# Altium PCB PCB1.PcbDoc (part 1 of 2)
Units mm, origin at the board's own origin, x right, y up, seen from the top; angles counter-clockwise.
Board outline 100 x 50 mm, 2 copper layers (Top Layer, Bottom Layer); 173 components, 108 nets, 510 pads, 764 vias.
Unrouted connection lines stored in the file: 12.
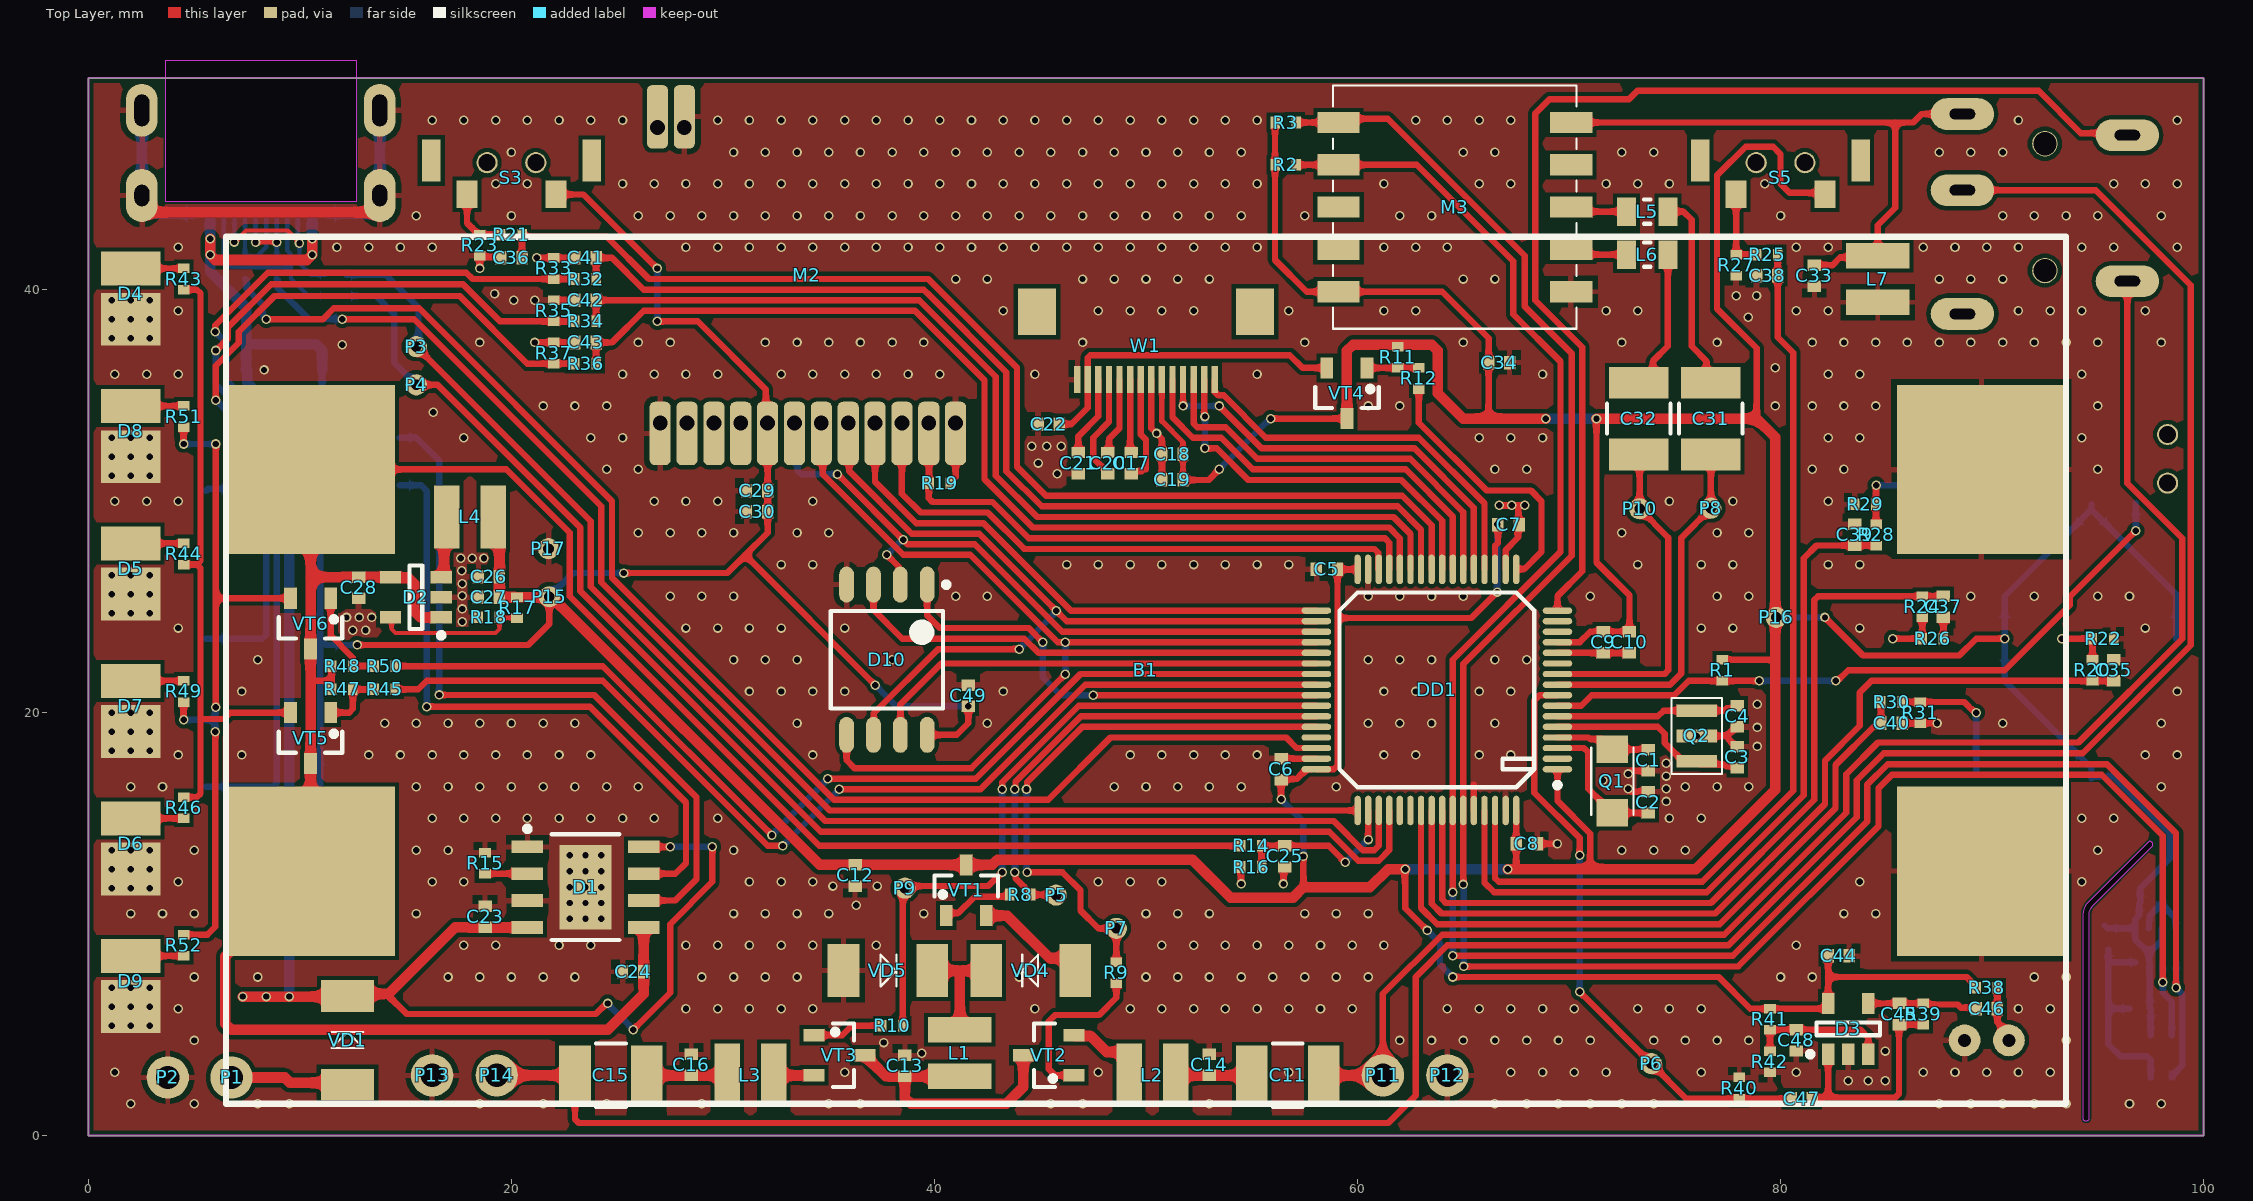
[diagram p0: Top Layer view]
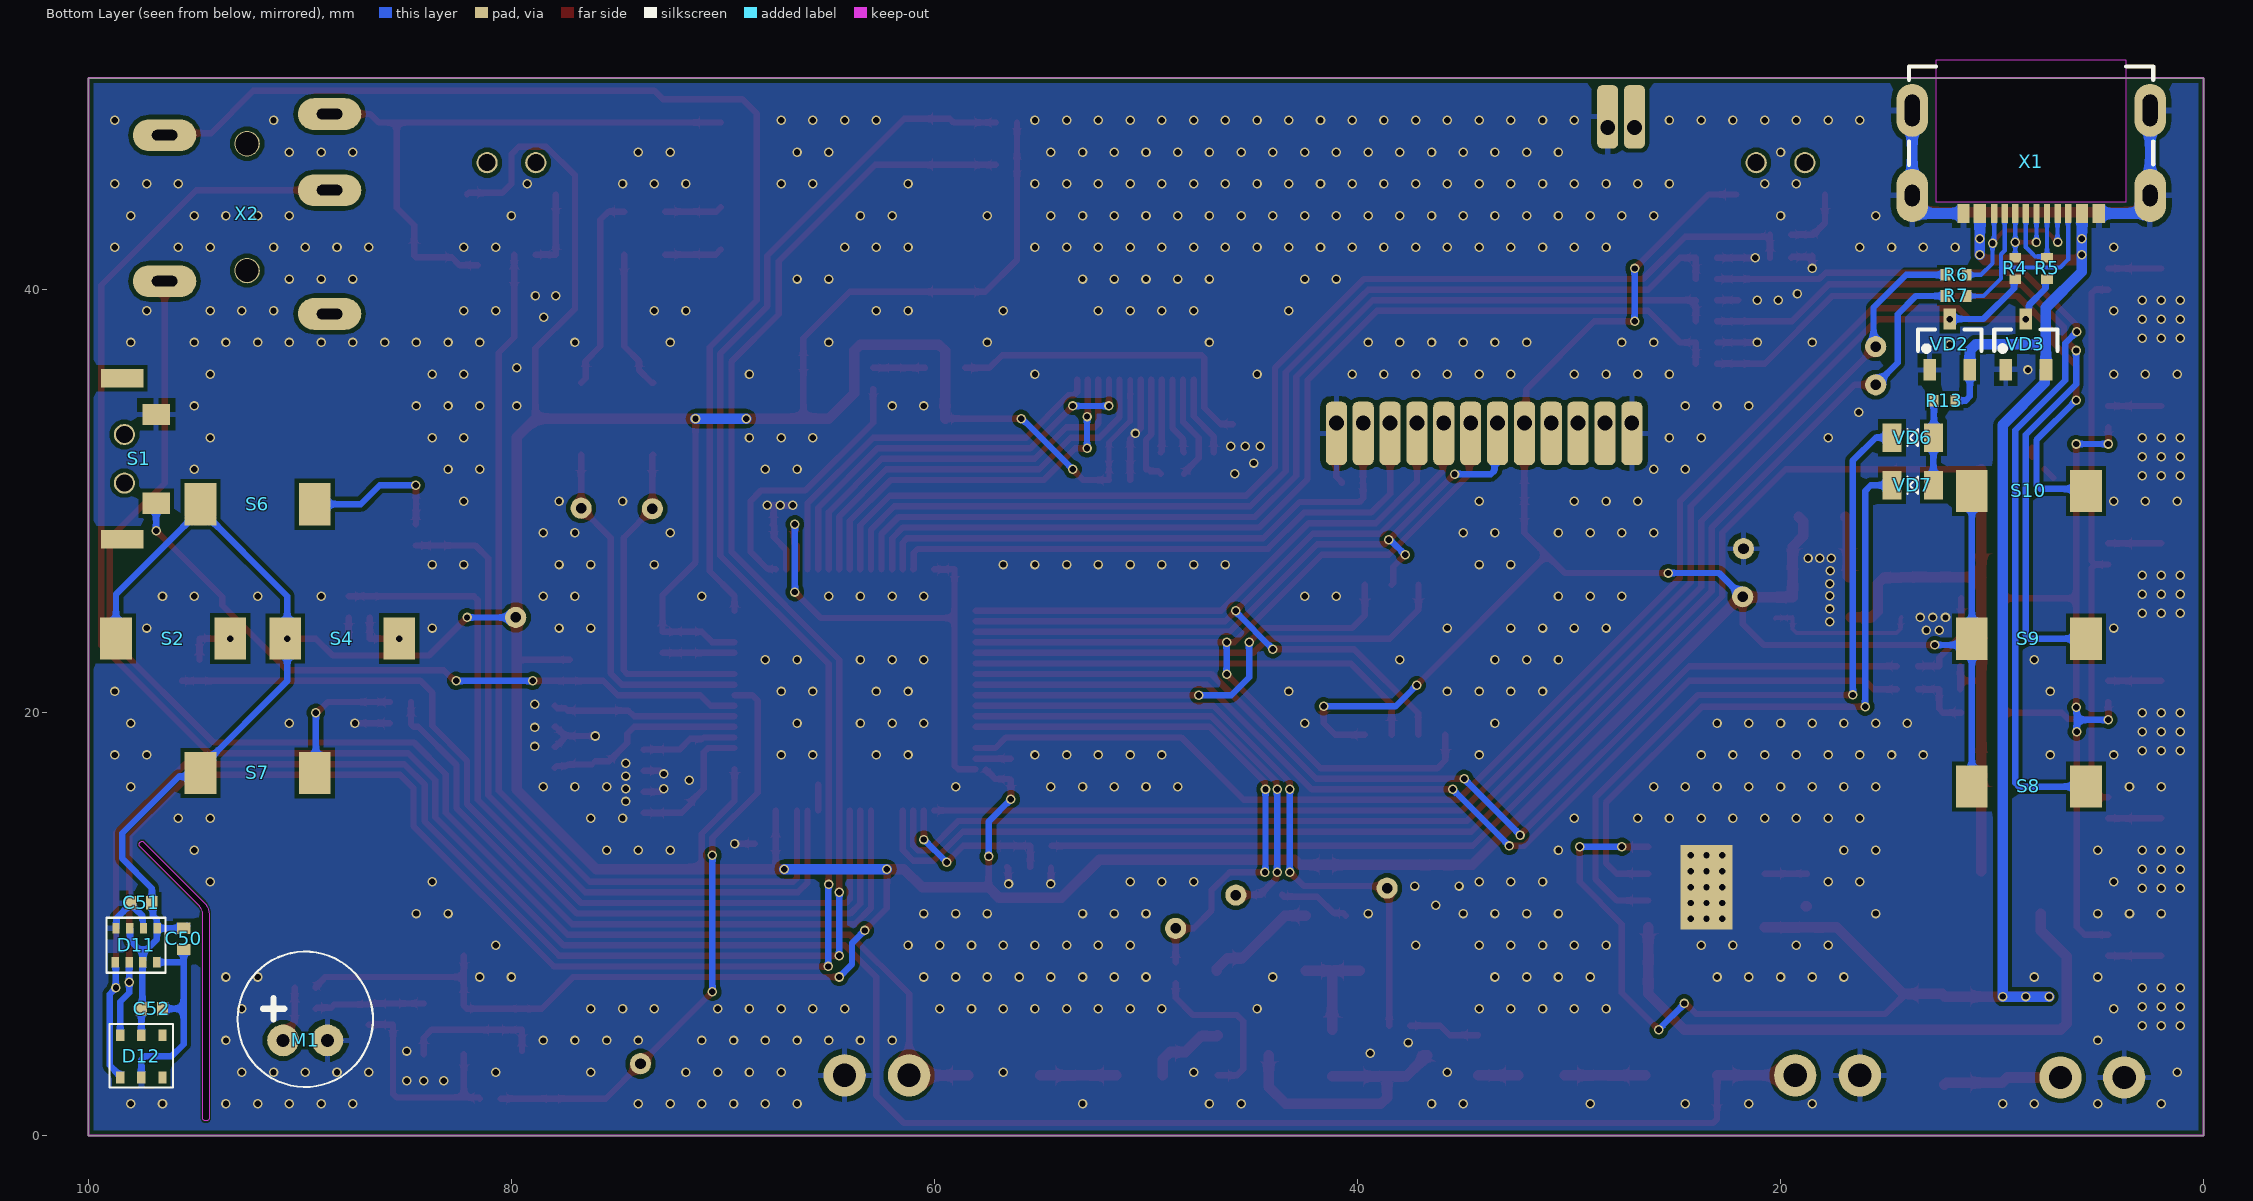
[diagram p1: Bottom Layer view, seen from below]
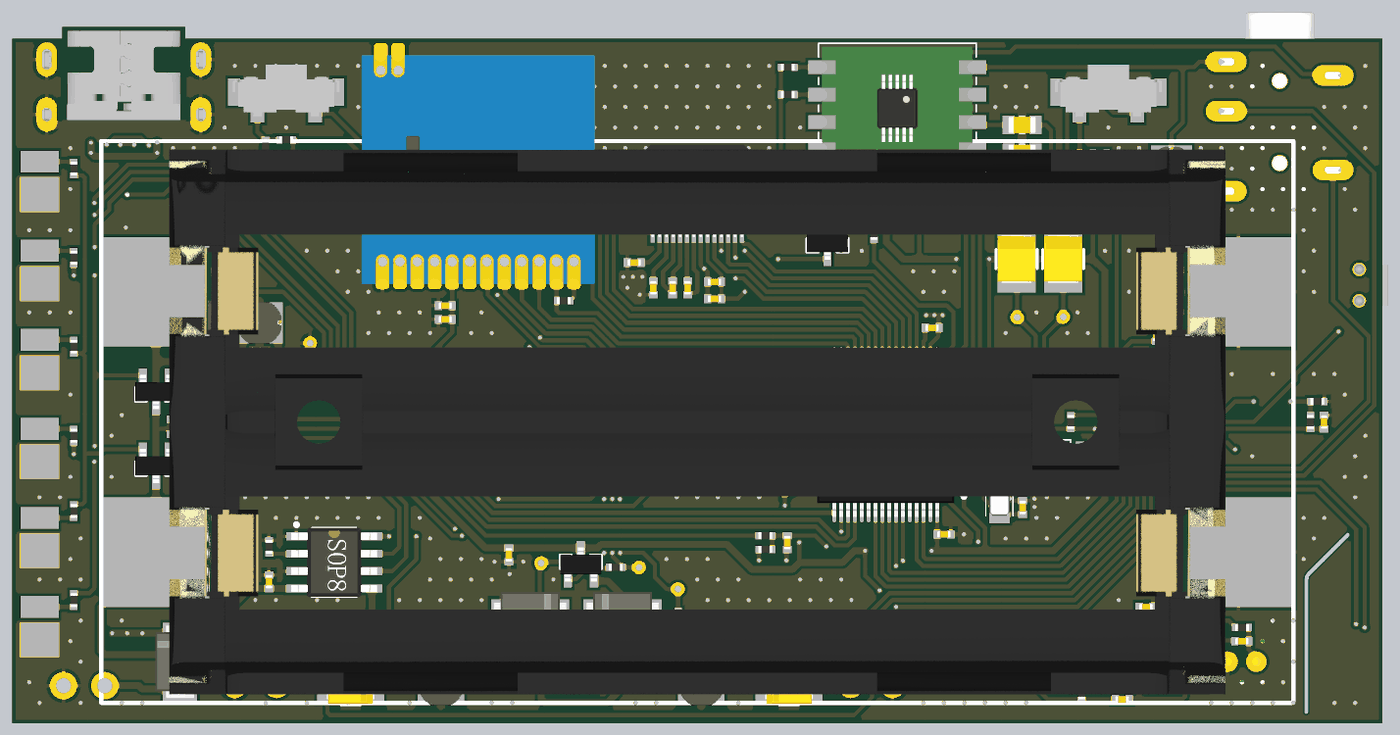
[diagram p3: 3D render of the assembled board from above, using the file's embedded part models]
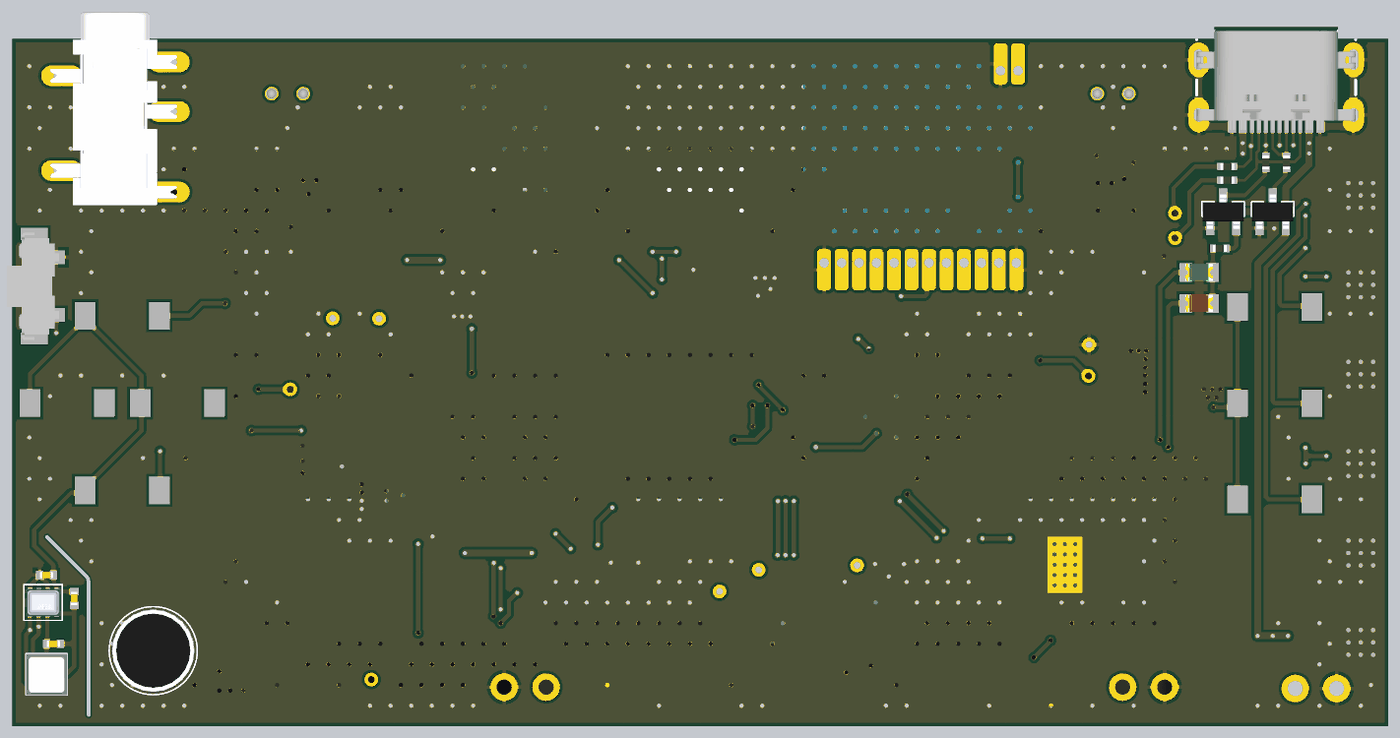
[diagram p4: 3D render of the assembled board from below, using the file's embedded part models]

## Layer stack, top to bottom
Top Solder: solder mask 0.0102, Solder Resist, Dk 3.5
Top Layer: signal copper 0.0356
Dielectric 1: dielectric 0.32, FR-4, Dk 4.8
Bottom Layer: signal copper 0.0356
Bottom Solder: solder mask 0.0102, Solder Resist, Dk 3.5

## Board outline
0,0 0,50 100,50 100,0
cut-out: 94.6,0.8 94.6,10.459 cw(c95.183,10.459) 94.771,10.871 97.6,13.7 ccw(c97.455,13.755) 97.4,13.9 94.541,11.041 ccw(c95.124,10.459) 94.3,10.459 94.3,0.8 ccw(c94.45,0.85)

## Design rules (kind name [scope] priority, off if disabled: settings)
Clearance [All] p1: gap=0.1 ignorepadtopadclearanceinfootprint=FALSE except(0.2: Arc-Arc Arc-Poly Track-Poly SMDPad-Poly THPad-Poly Via-Poly Fill-Poly Poly-Poly)
HoleSize [All] p1: absolutevalues=TRUE maxlimit=6.3 minlimit=0.15 maxpercent=80.000 minpercent=20.000
HoleToHoleClearance [All] p1: gap=0.2 allowstackedmicrovias=TRUE
MinimumSolderMaskSliver [All] p1: minsoldermaskwidth=0.1
PolygonConnect [All] p1: connectstyle=Relief reliefconductorwidth=0.254 reliefentries=4 polygonreliefangle="90 Angle" airgapwidth=0.254
RoutingVias [All] p1: holewidth=0.15 width=0.25 viastyle="Through Hole" minholewidth=0.2 minwidth=0.35 maxholewidth=0.3 maxwidth=0.6
SilkToSilkClearance [All] p1 off: silktosilkclearance=0.15
SilkToSolderMaskClearance [IsPad] p1: minsilkscreentomaskgap=0.15 clearancetoexposedcopper=TRUE
SolderMaskExpansion [All] p1: expansion=0.038 istentingtop=FALSE
Width [All] p1: maxlimit=0.5 minlimit=0.1 preferedwidth=0.3
25 further rules are at their usual default settings.

## Classes and differential pairs
component class IN: C44 C45 C46 C47 C48 D3 R38 R39 R40 R41 R42
polygon class Bottom: JOPA_L01_P003
component class Main: C1 C2 C3 C4 C5 C6 C7 C8 C9 C10 DD1 M1 P1 P2 P3 P4 P5 P6 P7 P8 P9 P10 P11 P12 P13 P14 P15 P16 P17 Q1 Q2 R1 R2 R3 R4 R5 R6 R7 S1 VD1 VD2 VD3 X1 X2
component class Designator: B1 C23 C24 C25 C26 C27 C28 D1 D2 L4 R13 R14 R15 R16 R17 R18 VD6 VD7

## Components (designator, comment, footprint, x,y, rotation, side; value= is the part's Value field where it differs from the comment)
B1 "18650_X2_holder" 18650_X2 50,22 r90 top locked
C1 "12pF" Cap_0402 73.75,17.75 r270 top
C2 "12pF" Cap_0402 73.742,15.758 r90 top
C3 "33pF" Cap_0402 77.953,17.886 r90 top
C4 "33pF" Cap_0402 77.953,19.824 r270 top
C5 "100nF" Cap_0402 58.554,26.774 r180 top
C6 "100nF" Cap_0402 56.388,17.324 r90 top
C7 "100nF" Cap_0402 67.14,28.888 r0 top
C8 "100nF" Cap_0402 68.004,13.8 r0 top
C9 "100nF" Cap_0402 71.628,23.324 r270 top
C10 "1uF" Cap_0402 72.858,23.324 r270 top
C11 "6.3v 220uF" "Tantalum TYPE-B" 56.7,2.85 r90 top
C12 "100nF" Cap_0402 36.25,12.3 r90 top
C13 "10uF" Cap_0402 38.6,3.3 r90 top
C14 "1uF" Cap_0402 53,3.35 r90 top
C15 "6.3v 220uF" "Tantalum TYPE-B" 24.7,2.85 r270 top
C16 "1uF" Cap_0402 28.5,3.35 r90 top
C17 "1uF" Cap_0402 49.3,31.8 r270 top
C18 "100nF" Cap_0402 51.25,32.226 r180 top
C19 "1uF" Cap_0402 51.25,31 r180 top
C20 "1uF" Cap_0402 48.2,31.8 r90 top
C21 "22nF" Cap_0402 46.8,31.8 r90 top
C22 "1uF" Cap_0402 45.4,33.641 r180 top
C23 "10uF" Cap_0402 18.75,10.345 r90 top
C24 "10uF" Cap_0402 25.75,7.75 r180 top
C25 "1uF" Cap_0402 56.569,13.2 r90 top
C26 "10uF" Cap_0402 18.93,26.431 r180 top
C27 "100nF" Cap_0402 18.93,25.456 r180 top
C28 "10uF" Cap_0402 12.77,25.906 r270 top
C29 "100nF" Cap_0402 31.61,30.5 r180 top
C30 "10uF" Cap_0402 31.61,29.5 r180 top
C31 "6.3v 220uF" "Tantalum TYPE-B" 76.7,33.9 r0 top
C32 "6.3v 220uF" "Tantalum TYPE-B" 73.3,33.9 r0 top
C33 "22pF" Cap_0402 81.6,40.656 r270 top
C34 "100nF" Cap_0402 66.7,36.55 r0 top
C35 "100nF" Cap_0402 95.75,22 r90 top
C36 "100nF" Cap_0402 20,41.5 r180 top
C37 "100nF" Cap_0402 87.7,25 r270 top
C38 "100nF" Cap_0402 79.368,40.656 r180 top
C39 "100nF" Cap_0402 83.5,28.4 r90 top
C40 "100nF" Cap_0402 85.25,19.5 r0 top
C41 "100nF" Cap_0402 23.5,41.5 r180 top
C42 "100nF" Cap_0402 23.5,39.5 r180 top
C43 "100nF" Cap_0402 23.5,37.5 r180 top
C44 "100nF" Cap_0402 82.75,8.5 r180 top
C45 "15pF" Cap_0402 85.625,5.75 r270 top
C46 "4.7uF" Cap_0402 89.75,6 r180 top
C47 "4.7uF" Cap_0402 81,1.75 r180 top
C48 "2.2uF" Cap_0402 80.75,4.5 r270 top
C49 "100nF" Cap_0402 41.6,20.8 r90 top
C50 "100nF" Cap_0402 95.5,9.3 r270 bottom
C51 "100nF" Cap_0402 97.5,11 r0 bottom
C52 "100nF" Cap_0402 97,6 r180 bottom
D1 "TP4056" "SOP-8-with thermal pad" 23.5,11.75 r0 top
D2 "NCP1529-D" SOT-23-5 15.48,25.456 r180 top
D3 "AD5841ART" SOT-23-5 83.2,5.05 r90 top
D4 "2835" "2835 LED" 2,39.5 r90 top
D5 "2835" "2835 LED" 2,26.5 r90 top
D6 "2835" "2835 LED" 2,13.5 r90 top
D7 "2835" "2835 LED" 2,20 r90 top
D8 "2835" "2835 LED" 2,33 r90 top
D9 "2835" "2835 LED" 2,7 r90 top
D10 "W25Q32FVSIG" SOIC8 37.75,22.5 r270 top
D11 "BMP-280" BMP-280 97.75,9 r270 bottom
D12 "AHT20" AHT20 97.5,3.75 r270 bottom
DD1 "STM32F103RBT6" LQFP-64 63.754,21.074 r180 top
L1 "CD32" CD32 41.2,3.9 r270 top value=100uH
L2 "CD32" CD32 50.3,2.85 r0 top value=47uH
L3 "CD32" CD32 31.3,2.85 r180 top value=47uH
L4 "CD32" CD32 18.044,29.25 r0 top value=2.2uH
L5 "1.5k 100mHz" Cap_0805 73.701,43.688 r0 top
L6 "1.5k 100mHz" Cap_0805 73.701,41.656 r0 top
L7 "CD32" CD32 84.6,40.5 r270 top value=100uH
M1 "Mic_6x2.2" "Electret mic 6x2.2" 89.75,5.5 r180 bottom
M2 "Transiceiver" SI4432 34.015,40.304 r180 top
M3 "RRD-102" RRD-102 64.6,43.9 r0 top
P1 "Probe_1mm" Probe_1mm 6.763,2.75 r0 top
P2 "Probe_1mm" Probe_1mm 3.75,2.75 r0 top
P3 "Probe_0.5mm" Probe_0.5mm 15.5,37.305 r0 top
P4 "Probe_0.5mm" Probe_0.5mm 15.5,35.5 r90 top
P5 "Probe_0.5mm" Probe_0.5mm 45.75,11.375 r90 top
P6 "Probe_0.5mm" Probe_0.5mm 73.9,3.4 r90 top
P7 "Probe_0.5mm" Probe_0.5mm 48.6,9.8 r90 top
P8 "Probe_0.5mm" Probe_0.5mm 76.708,29.666 r90 top
P9 "Probe_0.5mm" Probe_0.5mm 38.6,11.7 r90 top
P10 "Probe_0.5mm" Probe_0.5mm 73.337,29.639 r90 top
P11 "Probe_1mm" Probe_1mm 61.2,2.85 r0 top
P12 "Probe_1mm" Probe_1mm 64.25,2.85 r0 top
P13 "Probe_1mm" Probe_1mm 16.25,2.85 r0 top
P14 "Probe_1mm" Probe_1mm 19.304,2.85 r0 top
P15 "Probe_0.5mm" Probe_0.5mm 21.788,25.478 r90 top
P16 "Probe_0.5mm" Probe_0.5mm 79.8,24.5 r90 top
P17 "Probe_0.5mm" Probe_0.5mm 21.75,27.75 r90 top
Q1 "FC-135" "Quarz FC-135" 72.05,16.758 r270 top
Q2 "CSTCE3213" "Quartz MEMS CSTCE" 76.041,18.895 r180 top
R1 "Res_0402_10K" Res_0402 77.25,22 r270 top value=10K
R2 "Res_0402_10K" Res_0402 56.6,45.9 r0 top value=10K
R3 "Res_0402_10K" Res_0402 56.6,47.9 r0 top value=10K
R4 "Res_0402_20R" Res_0402 8.9,41 r270 bottom value=20R
R5 "Res_0402_20R" Res_0402 7.4,41 r270 bottom value=20R
R6 "Res_0402_20R" Res_0402 11.7,40.7 r0 bottom value=20R
R7 "Res_0402_20R" Res_0402 11.7,39.7 r0 bottom value=20R
R8 "Res_0402_200R" Res_0402 44.05,11.4 r180 top value=200R
R9 "Res_0402_200R" Res_0402 48.6,7.7 r270 top value=200R
R10 "Res_0402_200R" Res_0402 38,5.2 r180 top value=200R
R11 "Res_0402_3.3K" Res_0402 61.9,36.8 r90 top value=3.3K
R12 "Res_0402_200R" Res_0402 62.9,35.8 r90 top value=200R
R13 "Res_0402_1K" Res_0402 12.25,34.75 r0 bottom value=1K
R14 "Res_0402_75K" Res_0402 54.969,13.7 r0 top value=75K
R15 "Res_0402_1.2K" Res_0402 18.75,12.885 r90 top value=1.2K
R16 "Res_0402_200K" Res_0402 54.969,12.7 r180 top value=200K
R17 "Res_0402_910K" Res_0402 20.264,24.956 r270 top value=910K
R18 "Res_0402_220K" Res_0402 18.93,24.506 r180 top value=220K
R19 "Res_0402_10K" Res_0402 40.25,30.853 r0 top value=10K
R20 "Res_0402_240K" Res_0402 94.75,22 r270 top value=240K
R21 "Res_0402_240K" Res_0402 20,42.6 r0 top value=240K
R22 "Res_0402_10K" Res_0402 95.25,23.5 r0 top value=10K
R23 "Res_0402_10K" Res_0402 18.5,42.1 r270 top value=10K
R24 "Res_0402_240K" Res_0402 86.7,25 r90 top value=240K
R25 "Res_0402_240K" Res_0402 79.368,41.656 r0 top value=240K
R26 "Res_0402_10K" Res_0402 87.2,23.5 r0 top value=10K
R27 "Res_0402_10K" Res_0402 77.9,41.156 r270 top value=10K
R28 "Res_0402_240K" Res_0402 84.53,28.4 r270 top value=240K
R29 "Res_0402_10K" Res_0402 84,29.854 r180 top value=10K
R30 "Res_0402_240K" Res_0402 85.25,20.5 r180 top value=240K
R31 "Res_0402_10K" Res_0402 86.604,20 r270 top value=10K
R32 "Res_0402_240K" Res_0402 23.5,40.5 r0 top value=240K
R33 "Res_0402_10K" Res_0402 22,41 r90 top value=10K
R34 "Res_0402_240K" Res_0402 23.5,38.5 r0 top value=240K
R35 "Res_0402_10K" Res_0402 22,39 r90 top value=10K
R36 "Res_0402_240K" Res_0402 23.5,36.5 r0 top value=240K
R37 "Res_0402_10K" Res_0402 22,37 r90 top value=10K
R38 "Res_0402_2K" Res_0402 89.75,7 r0 top value=2K
R39 "Res_0402_75K" Res_0402 86.75,5.75 r270 top value=75K
R40 "Res_0402_10K" Res_0402 78.05,2.25 r90 top value=10K
R41 "Res_0402_100K" Res_0402 79.5,5.5 r270 top value=100K
R42 "Res_0402_100K" Res_0402 79.5,3.5 r270 top value=100K
R43 "Res_0402_13R" Res_0402 4.5,40.5 r90 top value=13R
R44 "Res_0402_13R" Res_0402 4.5,27.5 r90 top value=13R
R45 "Res_0402_200R" Res_0402 14,21.1 r180 top value=200R
R46 "Res_0402_13R" Res_0402 4.5,15.5 r270 top value=13R
R47 "Res_0402_3.3K" Res_0402 12,21.1 r180 top value=3.3K
R48 "Res_0402_3.3K" Res_0402 12,22.2 r0 top value=3.3K
R49 "Res_0402_13R" Res_0402 4.5,21 r90 top value=13R
R50 "Res_0402_200R" Res_0402 14,22.2 r180 top value=200R
R51 "Res_0402_13R" Res_0402 4.5,34 r90 top value=13R
R52 "Res_0402_13R" Res_0402 4.5,9 r270 top value=13R
S1 "Angular tact button" Tact_button_3X6X3.5mm 98.8,32 r270 bottom
S2 "Silent Tact Switch" "Tact Switch_6*6*5mm" 96,23.5 r180 bottom
S3 "Angular tact button" Tact_button_3X6X3.5mm 20,46.5 r180 top
S4 "Silent Tact Switch" "Tact Switch_6*6*5mm" 88,23.5 r180 bottom
S5 "Angular tact button" Tact_button_3X6X3.5mm 80,46.5 r180 top
S6 "Silent Tact Switch" "Tact Switch_6*6*5mm" 92,29.854 r180 bottom
S7 "Silent Tact Switch" "Tact Switch_6*6*5mm" 92,17.146 r180 bottom
S8 "Silent Tact Switch" "Tact Switch_6*6*5mm" 8.255,16.51 r180 bottom
S9 "Silent Tact Switch" "Tact Switch_6*6*5mm" 8.255,23.495 r180 bottom
S10 "Silent Tact Switch" "Tact Switch_6*6*5mm" 8.255,30.48 r180 bottom
VD1 "SS34" DO-214AA 12.25,4.5 r90 top
VD2 "BAT54 KL4" SOT-23 12,37.413 r90 bottom
VD3 "BAT54 KL4" SOT-23 8.4,37.414 r90 bottom
VD4 "SS34" DO-214AA 44.55,7.8 r180 top
VD5 "SS34" DO-214AA 37.8,7.8 r0 top
VD6 "0805_LED_GREEN" 0805_LED_GREEN 13.75,33 r0 bottom
VD7 "0805_LED_RED" 0805_LED_RED 13.75,30.75 r0 bottom
VT1 "A03401" SOT-23 41.5,11.6 r90 top
VT2 "A03401" SOT-23 45.4,3.8 r180 top
VT3 "A03401" SOT-23 35.5,3.8 r0 top
VT4 "A03401" SOT-23 59.5,35.1 r270 top
VT5 "A03401" SOT-23 10.5,18.8 r270 top
VT6 "A03401" SOT-23 10.5,24.206 r270 top
W1 "LCD_UC1601s" LCD_connector_14PIN_0.5mm 50,37 r180 top
X1 "Type-c" Type-c_0.8 8.15,43.35 r180 bottom
X2 "Jack3.5_male" Jack3.5_male 92.5,46.9 r0 bottom

## Footprints (in the part's own frame and the unit in brackets; to place one, negate y for a bottom-side part, rotate by r counter-clockwise, add the part's x,y. Pads: shape width x height; smd on the part's side, far side on the other; paste and mask are expansions set on the pad)
0805_LED_GREEN [mm]
  rect 0.9x1.35 smd: 1(-0.975,0) 2(0.975,0)
  silkscreen extent -0.25,-0.4 0.25,0.4, body extent -1,-0.63 1,0.63, height 1.1
0805_LED_RED [mm]
  rect 0.9x1.35 smd: 1(-0.975,0) 2(0.975,0)
  silkscreen extent -0.25,-0.4 0.25,0.4, body extent -1,-0.63 1,0.63, height 1.1
"2835 LED" [mm]
  rect 2.5x2.8 smd: 1(-0.9,0)
  rect 1.6x2.8 smd: 2(1.5,0)
  body extent -1.75,-1.4 1.75,1.4, height 0.7
18650_X2 [mm] "Two_18650_holder"
  rect 8x8 smd: 1(-9.5,39.5) 2(-9.5,-39.5) 3(9.5,39.5) 4(9.5,-39.5)
  silkscreen extent -20.5,-43.5 20.5,43.5, body extent -19.89,-43 19.89,43, height 18.83
AHT20 [mm]
  rect 0.55x0.4 smd: 1(-1,1) 2(-1,0) 3(-1,-1) 4(1,-1) 5(1,0) 6(1,1)
  silkscreen extent -1.53,-1.5 1.47,1.5, body extent -1.5,-1.5 1.5,1.5, height 1
BMP-280 [mm]
  rect 0.5x0.35 smd: 1(0.8,0.975) 2(0.8,0.325) 3(0.8,-0.325) 4(0.8,-0.975) 5(-0.8,-0.95) 6(-0.8,-0.3) 7(-0.8,0.35) 8(-0.8,1)
  silkscreen extent -1.3,-1.4 1.3,1.4, body extent -1,-1.25 1,1.25, height 1
Cap_0402 [mm]
  rect 0.54x0.64 smd: 1(-0.5,0) 2(0.5,0)
  body extent -0.5,-0.25 0.5,0.25, height 0.35
Cap_0805 [mm]
  rect 0.9x1.35 smd: 1(-0.975,0) 2(0.975,0)
  silkscreen extent -0.15,-0.58 0.15,0.58, body extent -1,-0.6 1,0.6, height 0.45
CD32 [mm] "Inductor"
  rect 1.2x3 smd: 1(-1.1,0) 2(1.1,0)
  body extent -1.65,-1.5 1.65,1.5, height 2.1
DO-214AA [mm] "Diode"
  rect 1.5x2.5 smd: 1(-2.1,0) 2(2.1,0)
  silkscreen extent -0.35,-0.75 0.4,0.75, body extent -2.7,-1.8 2.7,1.8, height 2.3
"Electret mic 6x2.2" [mm] "V=1.1-6 / I=500uA / R=2.2k"
  round 1.5 hole 0.6: 1(-1.05,-1) 2(1.05,-1)
  silkscreen extent -3.2,-3.2 3.2,3.2, body extent -3,-3 3,3, height 2.3
Jack3.5_male [mm]
  oval 3x1.5 hole 0.5 slot 1.2 at 0 deg: 1(-3.9,-1.4) 2(3.9,-0.4) 3(-3.9,2.2) 4(3.9,6.5) 5(-3.9,8.05)
  round 1.2 hole 1.1 unplated: h(0,0) h(0,6)
  body extent -4.47,-5 4.72,9, height 4.74
LCD_connector_14PIN_0.5mm [mm]
  rect 0.3x1.3 smd: CD(-2.25,1.25) CS(-3.25,1.25) LED_A(2.75,1.25) LED_C(3.25,1.25) RST(-2.75,1.25) SCK(-1.75,1.25) SDA(-1.25,1.25) VB0+(1.75,1.25) VB0-(1.25,1.25) VB1+(0.25,1.25) VB1-(0.75,1.25) VDD(-0.75,1.25) VLCD(2.25,1.25) VSS(-0.25,1.25)
  rect 1.8x2.2 smd: gnd(-5.15,-1.95) gnd(5.15,-1.95)
  body extent -5.7,-5.24 5.7,1.52, height 1.99
LQFP-64 [mm]
  oval 1.4x0.3 smd: 1(-5.7,3.75) 2(-5.7,3.25) 3(-5.7,2.75) 4(-5.7,2.25) 5(-5.7,1.75) 6(-5.7,1.25) 7(-5.7,0.75) 8(-5.7,0.25) 9(-5.7,-0.25) 10(-5.7,-0.75) 11(-5.7,-1.25) 12(-5.7,-1.75) 13(-5.7,-2.25) 14(-5.7,-2.75) 15(-5.7,-3.25) 16(-5.7,-3.75) 33(5.7,-3.75) 34(5.7,-3.25) 35(5.7,-2.75) 36(5.7,-2.25) 37(5.7,-1.75) 38(5.7,-1.25) 39(5.7,-0.75) 40(5.7,-0.25) 41(5.7,0.25) 42(5.7,0.75) 43(5.7,1.25) 44(5.7,1.75) 45(5.7,2.25) 46(5.7,2.75) 47(5.7,3.25) 48(5.7,3.75)
  oval 0.3x1.4 smd: 17(-3.75,-5.7) 18(-3.25,-5.7) 19(-2.75,-5.7) 20(-2.25,-5.7) 21(-1.75,-5.7) 22(-1.25,-5.7) 23(-0.75,-5.7) 24(-0.25,-5.7) 25(0.25,-5.7) 26(0.75,-5.7) 27(1.25,-5.7) 28(1.75,-5.7) 29(2.25,-5.7) 30(2.75,-5.7) 31(3.25,-5.7) 32(3.75,-5.7) 49(3.75,5.7) 50(3.25,5.7) 51(2.75,5.7) 52(2.25,5.7) 53(1.75,5.7) 54(1.25,5.7) 55(0.75,5.7) 56(0.25,5.7) 57(-0.25,5.7) 58(-0.75,5.7) 59(-1.25,5.7) 60(-1.75,5.7) 61(-2.25,5.7) 62(-2.75,5.7) 63(-3.25,5.7) 64(-3.75,5.7)
  silkscreen extent -5.82,-4.6 4.6,4.62, body extent -6,-6 6,6, height 1.6
Probe_0.5mm [mm]
  round 1 hole 0.5: 1(0,0)
Probe_1mm [mm]
  round 2 hole 1.1: 1(0,0)
"Quartz MEMS CSTCE" [mm] "8MHz / Packaging R0"
  rect 1.9x0.6 smd: 1(0,1.2) 2(0,0) 3(0,-1.2)
  silkscreen extent -1.2,-1.8 1.2,1.8, body extent -0.65,-1.6 0.65,1.6, height 0.7
"Quarz FC-135" [mm] "32x15mm"
  rect 1.3x1.5 smd: 1(-1.5,0) 2(1.5,0)
  silkscreen extent -1.6,-1 1.6,1, body extent -1.6,-0.75 1.6,0.75, height 0.8
Res_0402 [mm]
  rect 0.45x0.55 smd: 1(-0.5,0) 2(0.5,0)
  body extent -0.5,-0.25 0.5,0.25, height 0.35
RRD-102 [mm] "FM module"
  rect 2x1 smd: 1(-5.5,4) 2(-5.5,2) 3(-5.5,0) 4(-5.5,-2) 5(-5.5,-4) 6(5.5,-4) 7(5.5,-2) 8(5.5,0) 9(5.5,2) 10(5.5,4)
  silkscreen extent -5.75,-5.75 5.75,5.75, body extent -5.5,-5.5 5.5,5.5, height 1.99
SI4432 [mm]
  rrect50% 1x3 hole 0.7 copper offset 0,0.5: 1(-6.985,6.604) 2(-5.715,6.604) 3(-4.445,6.604) 4(-3.175,6.604) 5(-1.905,6.604) 6(-0.635,6.604) 7(0.635,6.604) 8(1.905,6.604) 9(3.175,6.604) 10(4.445,6.604) 11(5.715,6.604) 12(6.985,6.604)
  rrect50% 1x3 hole 0.7 copper offset 0,-0.5: 13(7.112,-7.366) 14(5.842,-7.366)
  body extent -8.5,-8.45 8.5,8.25, height 2
SOIC8 [mm]
  oval 1.7x0.7 smd: 1(-3.55,1.905) 2(-3.55,0.635) 3(-3.55,-0.635) 4(-3.55,-1.905) 5(3.55,-1.905) 6(3.55,-0.635) 7(3.55,0.635) 8(3.55,1.905)
  silkscreen extent -3.67,-2.65 2.3,2.93, body extent -4.05,-2.73 4.05,2.73, height 1.75
"SOP-8-with thermal pad" [mm] "TSOP, 8-Leads, Body 4,90x3,90mm, Pitch 1,27mm, Thermal Pad 4,00x2,45mm, IPC Medium Density"
  rect 1.5x0.6 smd: 1(-2.75,1.905) 2(-2.75,0.635) 3(-2.75,-0.635) 4(-2.75,-1.905) 5(2.75,-1.905) 6(2.75,-0.635) 7(2.75,0.635) 8(2.75,1.905)
  round 0.4 hole 0.3: 9(-0.75,-1.5) 9(-0.75,-0.75) 9(-0.75,0) 9(-0.75,0.75) 9(-0.75,1.5) 9(0,-1.5) 9(0,-0.75) 9(0,0.75) 9(0,1.5) 9(0.75,-1.5) 9(0.75,-0.75) 9(0.75,0) 9(0.75,0.75) 9(0.75,1.5)
  rect 2.45x4 hole 0.3: 9(0,0)
  silkscreen extent -2.87,-2.5 1.6,2.88, body extent -3.13,-2.53 3.13,2.53, height 1.76
SOT-23 [mm] "SOT23, 3-Leads, Body 2,90x2,45mm, Pitch 0,95mm, IPC Medium Density"
  rect 1x0.6 smd: 1(-1.2,0.95) 2(-1.2,-0.95) 3(1.2,0)
  silkscreen extent -0.32,-1.5 0.7,1.5, body extent -1.25,-1.5 1.25,1.5, height 1.1
SOT-23-5 [mm] "SOT23, 5-Leads, Body 2,90x2,45mm, Pitch 0,95mm, IPC Medium Density"
  rect 1x0.6 smd: 1(-1.2,0.95) 2(-1.2,0) 3(-1.2,-0.95) 4(1.2,-0.95) 5(1.2,0.95)
  silkscreen extent -1.33,-1.5 0.3,1.92, body extent -1.25,-1.5 1.25,1.5, height 1.1
"Tact Switch_6*6*5mm" [mm]
  rect 1.5x2 smd: 1(-2.7,0) 2(2.7,0)
  body extent -3.3,-3 3.3,3, height 4.3
Tact_button_3X6X3.5mm [mm]
  rect 0.88x2 smd: 0(-3.8,0.4) 0(3.8,0.4)
  rect 1x1.3 smd: 1(-2.1,2) 2(2.1,2)
  round 1 hole 0.8 unplated: h(-1.15,0.5) h(1.15,0.5)
  body extent -3.9,-1.6 3.9,2.2, height 3.5
"Tantalum TYPE-B" [mm]
  rect 2.8x1.5 smd: 1(0,1.7) 2(0,-1.7)
  silkscreen extent -1.5,-0.7 1.5,0.7, body extent -1.4,-1.75 1.4,1.75, height 1.91
Type-c_0.8 [mm]
  oval 1.5x2.5 hole 0.7 slot 1 at 90 deg: 1(-5.625,1.1) 1(5.625,1.1)
  oval 1.5x2.5 hole 0.7 slot 1.5 at 90 deg: 1(-5.625,5.125) 1(5.625,5.125)
  rect 0.58x0.9 smd: 1(-3.2,0.25) 1(3.2,0.25) 2(-2.425,0.25) 2(2.4,0.25)
  rect 0.3x0.9 smd: 3(-1.75,0.25) 4(-1.25,0.25) 5(-0.75,0.25) 6(-0.25,0.25) 7(0.25,0.25) 8(0.75,0.25) 9(1.25,0.25) 10(1.75,0.25)
  Keep-Out Layer board cut-out: -4.5,7.5 -4.5,0.8 4.5,0.8 4.5,7.5
  silkscreen extent -5.77,2.55 5.77,7.2, body extent -5.77,0 5.77,7.2, height 2.37

## Part data
C1 C2: library part Cap_0402_12pF, "12pF 50V  ±25% 0402 Ceramic Capacitor", Package=0402, Tolerance=±25%, Voltage=50V, Component Type=SMD, ComponentLink1Description=Datasheet, ComponentLink1URL=https://search.murata.co.jp/Ceramy/image/img/A01X/G101/ENG/GRM31CR60J107ME39-01.pdf
C3 C4: library part Cap_0402_33pF, "33pF 50V  ±25% 0402 Ceramic Capacitor", Package=0402, Tolerance=±25%, Voltage=50V, Component Type=SMD, ComponentLink1Description=Datasheet, ComponentLink1URL=https://search.murata.co.jp/Ceramy/image/img/A01X/G101/ENG/GRM31CR60J107ME39-01.pdf
C5 C6 C7 C8 C9 C12 C18 C27 C29 C34 C35 C36 C37 C38 C39 C40 C41 C42 C43 C44 C49 C50 C51 C52: library part Cap_0402_100nF, "100nF 50V  ±25% 0402 Ceramic Capacitor", Package=0402, Tolerance=±25%, Voltage=50V, Component Type=SMD, ComponentLink1Description=Datasheet, ComponentLink1URL=https://search.murata.co.jp/Ceramy/image/img/A01X/G101/ENG/GRM31CR60J107ME39-01.pdf
C10 C14 C16 C17 C19 C20 C22 C25: library part Cap_0402_1uF, "1uF 50V  ±25% 0402 Ceramic Capacitor", Package=0402, Tolerance=±25%, Voltage=50V, Component Type=SMD, ComponentLink1Description=Datasheet, ComponentLink1URL=https://search.murata.co.jp/Ceramy/image/img/A01X/G101/ENG/GRM31CR60J107ME39-01.pdf
C11 C15 C31 C32: library part Tantalum_TYPE-B
C13 C23 C24 C26 C28 C30: library part Cap_0402_10uF, "10uF 50V  ±25% 0402 Ceramic Capacitor", Package=0402, Tolerance=±25%, Voltage=50V, Component Type=SMD, ComponentLink1Description=Datasheet, ComponentLink1URL=https://search.murata.co.jp/Ceramy/image/img/A01X/G101/ENG/GRM31CR60J107ME39-01.pdf
C21: library part Cap_0402_22nF, "22nF 50V  ±25% 0402 Ceramic Capacitor", Package=0402, Tolerance=±25%, Voltage=50V, Component Type=SMD, ComponentLink1Description=Datasheet, ComponentLink1URL=https://search.murata.co.jp/Ceramy/image/img/A01X/G101/ENG/GRM31CR60J107ME39-01.pdf
C33: library part Cap_0402_22pF, "22pF 50V  ±25% 0402 Ceramic Capacitor", Package=0402, Tolerance=±25%, Voltage=50V, Component Type=SMD, ComponentLink1Description=Datasheet, ComponentLink1URL=https://search.murata.co.jp/Ceramy/image/img/A01X/G101/ENG/GRM31CR60J107ME39-01.pdf
C45: library part Cap_0402_15pF, "15pF 50V  ±25% 0402 Ceramic Capacitor", Package=0402, Tolerance=±25%, Voltage=50V, Component Type=SMD, ComponentLink1Description=Datasheet, ComponentLink1URL=https://search.murata.co.jp/Ceramy/image/img/A01X/G101/ENG/GRM31CR60J107ME39-01.pdf
C46 C47: library part Cap_0402_4.7uF, "4.7uF 50V  ±25% 0402 Ceramic Capacitor", Package=0402, Tolerance=±25%, Voltage=50V, Component Type=SMD, ComponentLink1Description=Datasheet, ComponentLink1URL=https://search.murata.co.jp/Ceramy/image/img/A01X/G101/ENG/GRM31CR60J107ME39-01.pdf
C48: library part Cap_0402_2.2uF, "2.2uF 50V  ±25% 0402 Ceramic Capacitor", Package=0402, Tolerance=±25%, Voltage=50V, Component Type=SMD, ComponentLink1Description=Datasheet, ComponentLink1URL=https://search.murata.co.jp/Ceramy/image/img/A01X/G101/ENG/GRM31CR60J107ME39-01.pdf
D1: "Lion Charger 1A", Name=TP4056
D2: "In 2.7-5.5v 1A 1.7MHz DC-DC", Name=NCP1529-D
D3: "CMOS Rail to Rail 1Mhz 2.7-5.5v"
D4 D5 D6 D7 D8 D9: library part "2835 Led", "2835 Led 2.85v 150mA"
D10: "SPI\QSPI Flash 4MB"
D12: "Temperature and humidity sensor -40+85 0-100% / 1.8-3.3v", Name=AHT20
DD1: "ARM Cortex-M3 MCU with 128 kB Flash 8kB ROM, 24 MHz CPU, LQFP-64", Manufacturer=STMicroelectronics, Package=LQFP-64, Component Type=SMD, Name=STM32F103RBT6
L1 L2 L3 L4 L7: "2.2uH", Size=CD32
L5 L6: library part 0805
M2: library part SI4432, Name=SI4432
M3: library part RRD-102(RDA5807M)
Q1: library part "Quarz 32.768kHz", "QUARZ 32.768kHz"
Q2: "QUARZ 8MHz"
R1 R2 R3 R4 R5 R6 R7 R8 R9 R10 R11 R12 R13 R14 R15 R16 R17 R18 R19 R20 R21 R22 R23 R24 R25 R26 R27 R28 R29 R30 R31 R32 R33 R34 R35 R36 R37 R38 R39 R40 R41 R42 R43 R44 R45 R46 R47 R48 R49 R50 R51 R52: "±1% 1/16W 0402", Package=0402, Power Rating=0.062W, Tolerance=±1%, Voltage=50V, ComponentLink1Description=Datasheet, ComponentLink1URL=https://www.yageo.com/upload/media/product/productsearch/datasheet/rchip/PYu-RC_Group_51_RoHS_L_10.pdf
S1 S3 S5: "3X6X3.5mm", Name="Angular tact button"
S2 S4 S6 S7 S8 S9 S10: "6*6*5mm Smd Silicone Button Switch", Name="Silent tact"
VD1 VD4 VD5: "Shotky diode 40v 3A (drop 0.75v 3A)", Name=SS34
VD2 VD3: "Diode Schotky / Voltage 30v / Current 0.2A / Capacitance 10pF", Name=MBR30100CT
VD6: "V=3v - 3.2v / I=20mA", Color=Green
VD7: "V=2v - 2.2v / I=20mA", Color=Red
VT1 VT2 VT3 VT4 VT5 VT6: "-30V, -4A max P-Channel  MOSFET, 60mOhm @ Vgs = -4.5V", Package=SOT-23, Component Type=SMD, ComponentLink1Description=Datasheet, ComponentLink1URL=https://datasheetspdf.com/pdf-file/767558/Alpha&OmegaSemiconductors/AO3416/1, Id=-4A, Name=A03401, Part Type=N-Channel, Rds=60mOhm, Vds=-30V
X1: library part USB_Type-c_0.8mm
X2: Name=Jack3.5

## Via types
v1: diameter 0.45, hole 0.3, Top Layer to Bottom Layer, tented both sides, 764 vias

## Nets (pads, with @x,y where several pads share a name; then routed paths per layer and width w, separated by ;. In a path a pad name is that pad's centre, name@x,y a point inside that pad or via, vN(x,y) a via of type N, cw(c..) or ccw(c..) an arc to the next point about the centre after c; other vN are vias at no path point)
3V3: C5.1 C6.1 C7.1 C8.1 C9.1 C10.1 C12.2 C18.1 C19.1 C26.1 C27.1 C29.1 C30.1 C34.1 C44.2 C49.1 C50.1 C51.1 C52.1 D3.5 D10.8 D11.2 D11.6 D11.8 D12.2 DD1.1 DD1.13 DD1.19 DD1.32 DD1.48 DD1.64 L4.2 M2.8 M3.5 P15.1 P16.1 R1.1 R2.1 R3.1 R11.2 R17.1 R38.1 R41.1 S2.1 S3.1 S4.1 S5.1 S6.1 S7.1 S8.1 S9.1 S10.1 VT1.2 VT4.2 W1.VDD | length 393.2
  Top Layer w0.254: W1.VDD@50.75,35.75 50.75,33.782 51.75,32.782 C19.1@51.75,31
  Top Layer w0.3: v1(12.7,23.2) 20.8,23.2 21.788,24.188 P15.1@21.788,25.478 ; S3.1@22.1,44.5 23.4,44.5 v1(26.9,41) ; v1(25.3,26.6) 30.2,26.6 31.05,27.45 ; v1(26.9,38.5) 28.8,38.5 32.026,35.274 32.026,33.784 M2.8@32.11,33.7 32.11,28.51 31.05,27.45 ; v1(37.2,21.3) 31.05,27.45 ; D10.8@39.655,18.95 41.05,18.95 41.6,19.5 v1(41.6,20.3) ; C19.1@51.75,31 52.962,31 v1(53.462,31.5) ; v1(55.9,33.9) 59.5,33.9 ; R3.1@56.1,47.9 56.1,41.4 57.6,39.9 64,39.9 66.2,37.7 66.2,33.9 ; v1@56.388,15.914 C6.1@56.388,16.824 ; C6.1@56.438,16.824 56.476,16.862 57.132,16.862 57.535,17.265 57.535,17.278 57.562,17.305 DD1.48@57.575,17.305 ; 57.438,11.738 v1(57.438,13.2) ; DD1.48@58.059,17.319 58.878,17.319 59.054,17.495 59.054,24.475 ; DD1.32@60.004,26.774 C5.1@59.054,26.774 59.054,24.475 ; v1(62.25,12.6) 62.25,10.75 v1@63.29,9.71 ; v1(64.504,7.5) 77.075,7.5 78.575,6 82.1,6 82.25,6.15 82.25,7.5 ; DD1.19@66.504,26.774 66.504,27.893 66.64,28.029 C7.1@66.64,28.888 66.612,28.888 v1(66.6,28.9) ; v1(66.6,25.7) 65.375,24.475 59.054,24.475 ; 67.504,12.6 DD1.64@67.504,15.374 ; DD1.1@69.454,17.324 69.454,15.826 71,14.28 71,12.6 ; DD1.13@69.454,23.324 70.519,23.324 70.519,23.343 71,23.824 C10.1@72.858,23.824 72.858,25.542 71.3,27.1 v1(71.3,33.9) ; R1.1@77.25,22.5 79.75,22.5 ; 78.87,33.9 78.87,37.23 77,39.1 77,45.4 78.35,46.75 79.65,46.75 80,46.4 80,45 80.425,44.575 82.025,44.575 S5.1@82.1,44.5 ; v1(82.1,24.5) 83.9,22.7 88.45,22.7 89.25,23.5 v1(90.6,23.5) ; C44.2@82.25,8.5 82.25,7.5 ; R38.1@89.25,7 89.25,7.05 88.8,7.5 82.25,7.5
  Top Layer w0.5: L4.2@19.144,29.25 18.93,29.036 18.93,28.35 19.43,27.85 C27.1@19.43,25.456 P15.1@21.766,25.456 ; P15.1@21.728,25.478 P15.1@21.788,25.478 P15.1@21.849,25.478 ; P15.1@21.871,25.5 34.571,12.8 42.73,12.8 42.981,13.051 52.199,13.051 54,11.25 56.95,11.25 57.438,11.738 60.587,11.738 61.449,12.6 v1(62.25,12.6) ; 59.5,33.9 59.5,37.107 59.793,37.4 63.507,37.4 63.8,37.107 63.8,35.1 65,33.9 66.2,33.9 v1(68.9,33.9) ; v1(67.104,12.6) 67.504,12.6 71,12.6 76,12.6 79.75,16.35 79.75,22.5 79.75,33.02 78.87,33.9 v1(71.3,33.9)
  Bottom Layer w0.3: S8.1@10.955,16.51 S9.1@10.955,23.495 ; S10.1@10.955,30.48 S9.1@10.955,23.495 ; v1(12.7,23.2) 11.25,23.2 S9.1@10.955,23.495 ; P15.1@21.788,25.478 22.91,26.6 v1(25.3,26.6) ; v1(26.9,38.5) v1(26.9,41) ; v1(37.2,21.3) 38.2,20.3 v1(41.6,20.3) ; v1(53.462,31.5) 55.853,33.89 55.89,33.89 v1(55.9,33.9) ; v1(56.388,15.9) 57.438,14.85 v1(57.438,13.2) ; v1(63.3,9.7) 63.9,9.1 63.9,8.104 v1(64.504,7.5) ; v1(66.6,25.7) v1@66.6,28.886 ; P16.1@79.8,24.5 v1(82.1,24.5) ; S7.1@94.7,16.896 S7.1@94.7,17.146 ; S6.1@94.7,29.854 S6.1@94.7,29.604 ; C50.1@95.33,9.92 95.45,9.8 96.725,9.8 96.775,9.85 96.775,10.233 96.958,10.416 96.958,10.958 C51.1@97,11 97,11.7 98.4,13.1 98.4,14.3 95.724,16.976 94.87,16.976 S7.1@94.7,17.146 ; D11.8@96.75,9.8 96.775,9.775 96.775,9.275 97.425,8.625 ; D12.2@97.5,4.75 C52.1@97.5,6 97.45,6.05 97.45,8.175 D11.2@97.425,8.2 97.425,8.625 ; D11.6@98.05,9.8 98.025,9.775 98.025,9.225 97.425,8.625 ; S2.1@98.7,23.5 98.7,25.604 S6.1@94.7,29.604 ; S7.1@94.7,17.146 94.7,17.396 90.6,21.496 v1(90.6,23.5) 90.6,25.504 S6.1@94.7,29.604
  Bottom Layer w0.5: v1(62.25,12.6) v1(67.104,12.6) ; v1(68.9,33.9) v1(71.3,33.9)
AGND: C9.2 C10.2 DD1.12 | length 3.4
  Top Layer w0.3: DD1.12@69.454,22.824 C9.2@71.628,22.824 C10.2@72.858,22.824
BAT+: B1.1 B1.3 C24.1 C28.1 D1.5 D2.1 D2.4 R14.1 R47.2 R48.1 VT5.2 VT6.2 | length 112.4
  Top Layer w0.3: B1.3@7.1,31.1 B1.3@7.5,31.5 ; B1.3@8.1,32.1 B1.3@8.1,32.524 ; 10.5,21.5 10.505,21.505 11.5,21.505 ; B1.3@10.5,31.5 19.75,31.5 22.75,28.5 22.75,25.5 34.55,13.7 R14.1@54.469,13.7 ; R47.2@11.5,21.1 11.5,21.505 ; R48.1@11.5,22.2 11.5,21.505
  Top Layer w0.5: B1.1@7.7,10.5 7.7,9.7 6.47,8.47 6.47,5.293 6.763,5 24.55,5 26.25,6.7 C24.1@26.25,7.75 D1.5@26.25,9.845 ; B1.1@10.5,12.5 10.5,17.6 10.5,21.5 10.5,23.006 10.5,26.406 ; B1.3@10.5,31.5 10.5,26.406 ; D2.1@16.68,24.506 15.699,24.506 15.406,24.799 15.406,26.086 15.113,26.378 14.308,26.378 D2.4@14.28,26.406 C28.1@12.77,26.406 10.5,26.406
BAT_MEAS: C25.2 DD1.50 R14.2 R16.1 | length 8.2
  Top Layer w0.3: R16.1@55.469,12.7 R14.2@55.469,13.7 C25.2@56.569,13.7 58.636,13.7 v1(59.418,12.918) ; v1(60.504,14) DD1.50@60.504,15.374
  Bottom Layer w0.3: v1(59.418,12.918) v1(59.418,12.918) 60.502,14 v1(60.504,14)
BUTTON_0: C36.1 DD1.25 R21.2 | length 54.6
  Top Layer w0.3: C36.1@20.5,41.5 R21.2@20.5,42.6 20.5,42.575 20.575,42.5 24.5,42.5 26.5,40.5 39.7,40.5 43.9,36.3 43.9,31.621 45.271,30.25 62.114,30.25 63.504,28.86 DD1.25@63.504,26.774
BUTTON_1: C41.1 DD1.26 R32.2 | length 49.9
  Top Layer w0.3: R32.2@24,40.5 24,41.25 C41.1@24,41.5 24.75,41.5 26.25,40 39.493,40 39.743,39.75 43.4,36.093 43.4,31.414 45.064,29.75 61.907,29.75 63.004,28.653 DD1.26@63.004,26.774
BUTTON_2: C42.1 DD1.27 R34.2 | length 48.5
  Top Layer w0.3: R34.2@24,38.5 C42.1@24,39.25 ; C42.1@24.12,39.33 24,39.45 C42.1@24,39.5 39.286,39.5 42.9,35.886 42.9,31.207 44.857,29.25 61.7,29.25 62.504,28.446 DD1.27@62.504,26.774
BUTTON_3: C43.1 DD1.28 R36.2 | length 48.3
  Top Layer w0.3: R36.2@24,36.5 C43.1@24,37.5 24.75,37.5 26.25,39 39.079,39 42.364,35.714 42.364,31.036 44.65,28.75 61.493,28.75 62.004,28.239 DD1.28@62.004,26.774
BUTTON_4: C40.1 DD1.55 R30.2 | length 32.8
  Top Layer w0.3: DD1.55@63.004,15.374 63.004,10.762 63.766,10 77.129,10 82.6,15.471 82.6,17.522 84.408,19.33 84.63,19.33 84.75,19.45 R30.2@84.75,20.5
BUTTON_5: C35.1 DD1.56 R20.2 | length 43.4
  Top Layer w0.3: DD1.56@63.504,15.374 63.504,10.969 63.973,10.5 73.021,10.5 76.922,10.5 82.1,15.678 82.1,17.729 83.75,19.379 83.75,20.95 84.3,21.5 C35.1@95.58,21.5
BUTTON_6: C37.1 DD1.57 R24.2 | length 39.5
  Top Layer w0.3: DD1.57@64.004,15.374 64.004,11.176 64.18,11 76.715,11 81.6,15.886 81.6,25.324 81.776,25.5 87.53,25.5 87.65,25.5 C37.1@87.7,25.5
BUTTON_7: C39.1 DD1.61 R28.2 | length 35.5
  Top Layer w0.3: DD1.61@66.004,15.374 66.004,11.953 66.457,11.5 ; 66.465,11.508 66.473,11.5 76.507,11.5 81.1,16.093 81.1,27.3 81.7,27.9 C39.1@83.5,27.9 R28.2@84.53,27.9
BUTTON_8: C38.1 DD1.62 R25.2 | length 44.8
  Top Layer w0.3: DD1.62@66.504,15.374 66.504,12.176 66.68,12 76.3,12 80.6,16.3 80.6,37.018 79.868,37.75 C38.1@79.868,40.656 R25.2@79.868,41.656
FLASH_CS: D10.1 DD1.41 | length 22.4
  Top Layer w0.3: D10.1@39.655,26.05 39.655,24.595 40.25,24 44.45,24 v1(45.126,23.324) ; v1(47.5,20.824) DD1.41@58.054,20.824
  Bottom Layer w0.3: v1(45.126,23.324) 45.126,21.674 45.976,20.824 v1(47.5,20.824)
FLASH_HOLD: D10.7 DD1.38 | length 21.9
  Top Layer w0.3: D10.7@38.385,18.95 38.385,20.385 40.324,22.324 DD1.38@58.054,22.324
FLASH_WP: D10.3 DD1.37 | length 23
  Top Layer w0.3: D10.3@37.115,26.05 37.115,24.858 38.473,23.5 44.243,23.5 44.919,22.824 44.954,22.824 DD1.37@58.054,22.824
FM_OUT_L: C31.2 DD1.9 P8.1 | length 17
  Top Layer w0.3: DD1.9@69.454,21.324 74.774,21.324 75.3,21.85 75.3,28.258 P8.1@76.708,29.666 76.708,32.192 C31.2@76.7,32.2
FM_OUT_R: C32.2 DD1.10 P10.1 | length 16.1
  Top Layer w0.3: DD1.10@69.454,21.824 74.524,21.824 74.7,22 74.7,28.276 P10.1@73.337,29.639 73.337,32.163 C32.2@73.3,32.2